# EAGLE board PCB_ (EAGLE 9.7.0)

Size 35.56 x 53.34 mm. Coordinates in mm from the lower left corner, seen from the top.
Outline: 0,52.06 0,50.8
Outline: 0,50.8 arc-90 2.54,53.34 33.02,53.34 arc-90 35.56,50.8 35.56,2.54
Outline: 35.56,1.28 35.56,2.54
Outline: 35.56,2.54 arc-90 33.02,0 2.54,0 arc-90 0,2.54 0,50.8
Copper layers (1*16): Top 0.035mm / dielectric 1.5mm / Bottom 0.035mm
Design rules "Fusion Electronics Design Rules": minimum track width 6mil, minimum drill 0.35mm, track to track 6mil, track to pad 6mil, pad to pad 6mil, via to via 6mil, smd to smd 6mil, copper to edge 40mil, drill to drill 6mil, minimum pad ring 10mil, minimum via ring 8mil, stop-mask expansion 4mil, vias tented up to drill 0mil, thermal gap 10mil

## Footprints (pad centres in the part's own frame; a part is rotated, then mirrored left to right if it is on the bottom)
0603 = smd 1.1 x 1: 1 -0.85,0; 2 0.85,0
SODFL3718X115 = smd 1.115 x 1.361: 1 -1.6,0; 2 1.6,0
12401832E402A = smd 0.3 x 0.7: A1 -2.75,5; A2 -2.25,5; A3 -1.75,5; A4 -1.25,5; A5 -0.75,5; A6 -0.25,5; A7 0.25,5; A8 0.75,5; A9 1.25,5; A10 1.75,5; A11 2.25,5; A12 2.75,5; B1 2.5,3.3; B2 2,3.3; B3 1.5,3.3; B4 1,3.3; B5 0.5,3.3; B6 0,3.3; B7 -0.5,3.3; B8 -1,3.3; B9 -1.5,3.3; B10 -2,3.3; B11 -2.5,3.3; B12 -3,3.3 | drill 0.5 pad 0.8 long: SH1 -4.13,3.09; SH2 4.13,3.09; SH3 4.49,-2.86; SH4 -4.49,-2.86 | hole 0.65: -3.6,4.34
1X03 = drill 1.016 pad 1.88: 1 0,0; 2 2.54,0; 3 5.08,0
1X17_NO_SILK = drill 1.016 pad 1.88: 1 0,0; 2 2.54,0; 3 5.08,0; 4 7.62,0; 5 10.16,0; 6 12.7,0; 7 15.24,0; 8 17.78,0; 9 20.32,0; 10 22.86,0; 11 25.4,0; 12 27.94,0; 13 30.48,0; 14 33.02,0; 15 35.56,0; 16 38.1,0; 17 40.64,0
1X19 = drill 1.016 pad 1.88: 1 0,0; 2 2.54,0; 3 5.08,0; 4 7.62,0; 5 10.16,0; 6 12.7,0; 7 15.24,0; 8 17.78,0; 9 20.32,0; 10 22.86,0; 11 25.4,0; 12 27.94,0; 13 30.48,0; 14 33.02,0; 15 35.56,0; 16 38.1,0; 17 40.64,0; 18 43.18,0; 19 45.72,0
1X02 = drill 1.016 pad 1.88: 1 0,0; 2 2.54,0
SJ_2S = smd 0.635 x 1.27: 1 -0.412,0; 2 0.412,0
AXIAL-0.3 = drill 0.9 pad 1.88: P$1 -3.81,0; P$2 3.81,0
QFN-56 = smd 0.875 x 0.2: 1 -3.437,2.6; 2 -3.437,2.2; 3 -3.437,1.8; 4 -3.437,1.4; 5 -3.437,1; 6 -3.437,0.6; 7 -3.437,0.2; 8 -3.437,-0.2; 9 -3.437,-0.6; 10 -3.437,-1; 11 -3.437,-1.4; 12 -3.437,-1.8; 13 -3.437,-2.2; 14 -3.437,-2.6; 29 3.437,-2.6; 30 3.437,-2.2; 31 3.437,-1.8; 32 3.437,-1.4; 33 3.437,-1; 34 3.437,-0.6; 35 3.437,-0.2; 36 3.437,0.2; 37 3.437,0.6; 38 3.437,1; 39 3.437,1.4; 40 3.437,1.8; 41 3.437,2.2; 42 3.437,2.6 | smd 0.2 x 0.875: 15 -2.6,-3.437; 16 -2.2,-3.437; 17 -1.8,-3.437; 18 -1.4,-3.437; 19 -1,-3.437; 20 -0.6,-3.437; 21 -0.2,-3.437; 22 0.2,-3.437; 23 0.6,-3.437; 24 1,-3.437; 25 1.4,-3.437; 26 1.8,-3.437; 27 2.2,-3.437; 28 2.6,-3.437; 43 2.6,3.437; 44 2.2,3.437; 45 1.8,3.437; 46 1.4,3.437; 47 1,3.437; 48 0.6,3.437; 49 0.2,3.437; 50 -0.2,3.437; 51 -0.6,3.437; 52 -1,3.437; 53 -1.4,3.437; 54 -1.8,3.437; 55 -2.2,3.437; 56 -2.6,3.437 | smd 3.2 x 3.2: EPAD 0,0
SOT25 = smd 0.7 x 1.2: 1 -0.95,-1.3; 2 0,-1.3; 3 0.95,-1.3; 4 0.95,1.3; 5 -0.95,1.3
USON-8 = smd 0.6 x 0.25: 1 -1.325,0.75; 2 -1.325,0.25; 3 -1.325,-0.25; 4 -1.325,-0.75; 5 1.325,-0.75; 6 1.325,-0.25; 7 1.325,0.25; 8 1.325,0.75
SWITCH-MOMENTARY-PTH-6.5MM = drill 1.016 pad 1.88: 1 -3.251,2.261; 2 3.251,2.261; 3 -3.251,-2.261; 4 3.251,-2.261
CRYSTAL-SMD-5X3.2-4PAD = smd 1.9 x 1.1: 1 -1.85,-1.15; 2 1.85,-1.15; 3 1.85,1.15; 4 -1.85,1.15

## Placement (x,y rotation side)
C1  1.0uF  [0603]  11.18,34.8 0 top
C2  1.0uF  [0603]  11.18,32.64 0 top
C3  1.0uF  [0603]  10.79,30.1 0 top
C4  1.0uF  [0603]  -26.67,43.18 0 top  (outside the outline)
C5  27pF  [0603]  -30.48,43.18 0 top  (outside the outline)
C6  27pF  [0603]  -34.29,43.18 0 top  (outside the outline)
C7  0.1uF  [0603]  -38.1,43.18 0 top  (outside the outline)
C8  0.1uF  [0603]  23.11,34.42 0 top
C9  0.1uF  [0603]  23.11,32.89 0 top
C10  0.1uF  [0603]  23.11,31.37 0 top
C11  0.1uF  [0603]  23.11,29.84 0 top
C12  0.1uF  [0603]  23.11,28.32 0 top
C13  0.1uF  [0603]  23.11,26.8 0 top
C14  0.1uF  [0603]  23.11,24.26 0 top
C15  0.1uF  [0603]  9.14,25.78 180 top
C16  0.1uF  [0603]  -30.48,46.99 0 top  (outside the outline)
D1  SCHOTTKY_MBR0520LT1GDO-219  [SODFL3718X115]  17.4,13.33 0 top
J1  12401832E402A  [12401832E402A]  17.78,5.08 0 top
J2  455-1750-1-ND  [1X03]  15.62,50.8 0 top
J3  455-1750-1-ND  [1X03]  7.24,50.8 0 top
J4  [1X17_NO_SILK]  33.02,5.08 90 top
J5  [1X19]  2.54,5.08 90 top
J6  [1X02]  23.88,50.72 0 top
JP1  [SJ_2S]  11.3,43.18 0 top
JP2  [SJ_2S]  13.97,43.18 0 top
R1  10k  [AXIAL-0.3]  -17.78,26.67 0 top  (outside the outline)
R2  10k  [AXIAL-0.3]  -27.94,26.67 0 top  (outside the outline)
R3  0.27  [0603]  -34.29,46.99 0 top  (outside the outline)
R4  0.27  [0603]  -38.1,46.99 0 top  (outside the outline)
R5  DNP  [0603]  -41.91,46.99 0 top  (outside the outline)
R6  10K  [0603]  -45.72,46.99 0 top  (outside the outline)
R7  1K  [0603]  -49.53,46.99 0 top  (outside the outline)
U1  RP2040  [QFN-56]  16.86,29.21 0 top
U2  AP7347DQ-33W5-7K-3.3V  [SOT25]  17.27,16.51 0 top
U3  W25QXX16MBIT-3X2  [USON-8]  15.24,35.56 0 top
U$1  SWITCH_MOMENTARY  [SWITCH-MOMENTARY-PTH-6.5MM]  22.45,43.18 0 top
Y1  12MHz  [CRYSTAL-SMD-5X3.2-4PAD]  16.26,22.73 0 top

## Library data of the parts
C1-C4 = SparkFun-Capacitors; PROD_ID: CAP-00868
C5 C6 = SparkFun-Capacitors; PROD_ID: CAP-09989
C7-C16 = SparkFun-Capacitors; PROD_ID: CAP-00810
D1 = Diode; CATEGORY: Diode; DATASHEET: https://www.onsemi.com/download/data-sheet/pdf/mbr0520lt1-d.pdf; DESCRIPTION: Diode 20 V 500mA Surface Mount SOD-123; FORWARD_CURRENT: 500mA; FORWARD_VOLTAGE: 385mV; MANUFACTURER: onsemi; MPN: MBR0520LT1G; OPERATING_TEMPERATURE: -65°C ~ 125°C; PACKAGE_SIZE: SOD-123; PACKAGE_TYPE: SMD; PART_STATUS: ACTIVE; REVERSE_VOLTAGE: 20V; ROHS: COMPLIANT; SERIES: MBR0520; SUBCATEGORY: Schottky Diodes; TYPE: Schottky Power Rectifier; ZENER_VOLTAGE: NA
J1 = Connector_USB; CATEGORY: USB Connector; CONTACTS: 24; CURRENT_RATING: 5A; DATASHEET: https://cdn.amphenol-cs.com/media/wysiwyg/files/documentation/datasheet/inputoutput/io_usb_3_2_type_c.pdf; DESCRIPTION: USB-C (USB TYPE-C) USB 3.2 Gen 2 (USB 3.1 Gen 2- Superspeed + (USB 3.1)) Receptacle Connector 24 Position Surface Mount- Right Angle- Through Hole; GENDER: Receptacle; MANUFACTURER: Amphenol ICC (Commercial Products); MPN: 12401832E402A; OPERATING_TEMPERATURE: -40℃ ~ 85℃; PACKAGE_SIZE: NA; PACKAGE_TYPE: SMD; PART_STATUS: ACTIVE; ROHS: COMPLIANT; SERIES: NA; SUBCATEGORY: USB TYPE-C; TYPE: Surface Mount-Right Angle-Through Hole; VOLTAGE_RATING: NA
J2 J3 = SparkFun-Connectors; PROD_ID: XXX-00000
J4-J6 = SparkFun-Connectors
JP1 JP2 = SparkFun-Retired
R1 R2 = SparkFun-Resistors; PROD_ID: RES-12183
R3 R4 = SparkFun-Resistors; PROD_ID: RES-08787
R5 = SparkFun-Resistors
R6 R7 = SparkFun-Resistors; PROD_ID: RES-10751
U1 = SparkFun-IC-Microcontroller; PROD_ID: IC-15502
U2 = SparkFun-IC-Power; PROD_ID: VREG-17101
U3 = SparkFun-IC-Memory; PROD_ID: IC-14905
U$1 = Tinkercad
Y1 = SparkFun-Clocks; PROD_ID: XTAL-08297

## Nets
3.3V: C2.1 C3.1 C7.1 C8.1 C9.1 C10.1 C11.1 C12.1 C13.1 C14.1 J4.1 J4.11 J4.16 J5.1 J5.11 R2.P$2 R6.1 U1.1 U1.10 U1.22 U1.33 U1.42 U1.43 U1.44 U1.48 U1.49 U2.5 U3.8
5V: D1.2 J1.A4 J1.A9 J1.B4 J1.B9
+V_SYS: C1.1 D1.1 R1.P$2 U2.1
DGND: C1.2 C2.2 C3.2 C4.2 C5.2 C6.2 C7.2 C8.2 C9.2 C10.2 C11.2 C12.2 C13.2 C14.2 C15.2 C16.2 J1.A1 J1.A12 J1.B1 J1.B12 J1.SH1 J1.SH2 J1.SH3 J1.SH4 J2.2 J3.2 J4.6 J4.17 J5.6 J5.17 J5.19 U1.19 U1.EPAD U2.2 U3.4 U$1.3 U$1.4
GPIO_0: J4.2 U1.2
GPIO_1: J4.3 U1.3
GPIO_6: J4.4 U1.8
GPIO_7: J4.5 U1.9
GPIO_8: J4.7 U1.11
GPIO_9: J4.8 U1.12
GPIO_10: J4.9 U1.13
GPIO_11: J4.10 U1.14
GPIO_12: J4.12 U1.15
GPIO_13: J4.13 U1.16
GPIO_14: J4.14 U1.17
GPIO_15: J4.15 U1.18
GPIO_16: J5.2 U1.27
GPIO_17: J5.3 U1.28
GPIO_18: J5.4 U1.29
GPIO_19: J5.5 U1.30
GPIO_20: J5.7 U1.31
GPIO_21: J5.8 U1.32
GPIO_22: J5.9 U1.34
GPIO_23: J5.10 U1.35
GPIO_24: J5.12 U1.36
GPIO_25: J5.13 U1.37
GPIO_26: J5.14 U1.38
GPIO_27: J5.15 U1.39
GPIO_28: J5.16 U1.40
GPIO_29: J5.18 U1.41
N$1: R1.P$1 U2.3
N$4: R2.P$1 U1.26
N$5: R3.2 U1.47
N$6: R4.2 U1.46
N$10: R7.1 U$1.1 U$1.2
N$14: J6.1 JP1.2
N$15: J6.2 JP2.1
QSPI_CS: R6.2 R7.2 U1.56 U3.1
QSPI_SCLK: U1.52 U3.6
QSPI_SD0: U1.53 U3.5
QSPI_SD1: U1.55 U3.2
QSPI_SD2: U1.54 U3.3
QSPI_SD3: U1.51 U3.7
SWCLK: U1.24
SWDIO: U1.25
TARGET_RX: JP2.2 U1.6
TARGET_SWCLK: J2.1 J3.1 U1.4
TARGET_SWDIO: J2.3 J3.3 U1.5
TARGET_TX: JP1.1 U1.7
USB_N: J1.A7 R4.1
USB_P: J1.A6 R3.1
VDD_1V1: C4.1 C15.1 C16.1 U1.23 U1.45 U1.50
X_IN: C5.1 R5.1 U1.20 Y1.1
X_OUT: C6.1 R5.2 U1.21 Y1.3

## Tracks (layer width: path | path; a pad name or v marks a point on that pad's centre or on a via)
3.3V  (27 unrouted)
5V  (4 unrouted)
+V_SYS  (3 unrouted)
DGND  (36 unrouted)
GPIO_0  (1 unrouted)
GPIO_1  (1 unrouted)
GPIO_6  (1 unrouted)
GPIO_7  (1 unrouted)
GPIO_8  (1 unrouted)
GPIO_9  (1 unrouted)
GPIO_10  (1 unrouted)
GPIO_11  (1 unrouted)
GPIO_12  (1 unrouted)
GPIO_13  (1 unrouted)
GPIO_14  (1 unrouted)
GPIO_15  (1 unrouted)
GPIO_16  (1 unrouted)
GPIO_17  (1 unrouted)
GPIO_18  (1 unrouted)
GPIO_19  (1 unrouted)
GPIO_20  (1 unrouted)
GPIO_21  (1 unrouted)
GPIO_22  (1 unrouted)
GPIO_23  (1 unrouted)
GPIO_24  (1 unrouted)
GPIO_25  (1 unrouted)
GPIO_26  (1 unrouted)
GPIO_27  (1 unrouted)
GPIO_28  (1 unrouted)
GPIO_29  (1 unrouted)
N$1  (1 unrouted)
N$4  (1 unrouted)
N$5  (1 unrouted)
N$6  (1 unrouted)
N$10  (2 unrouted)
N$14  (1 unrouted)
N$15  (1 unrouted)
QSPI_CS  (3 unrouted)
QSPI_SCLK  (1 unrouted)
QSPI_SD0  (1 unrouted)
QSPI_SD1  (1 unrouted)
QSPI_SD2  (1 unrouted)
QSPI_SD3  (1 unrouted)
TARGET_RX  (1 unrouted)
TARGET_SWCLK  (2 unrouted)
TARGET_SWDIO  (2 unrouted)
TARGET_TX  (1 unrouted)
USB_N  (1 unrouted)
USB_P  (1 unrouted)
VDD_1V1  (5 unrouted)
X_IN  (3 unrouted)
X_OUT  (3 unrouted)